# EAGLE board isp_programmer (EAGLE 4.03)
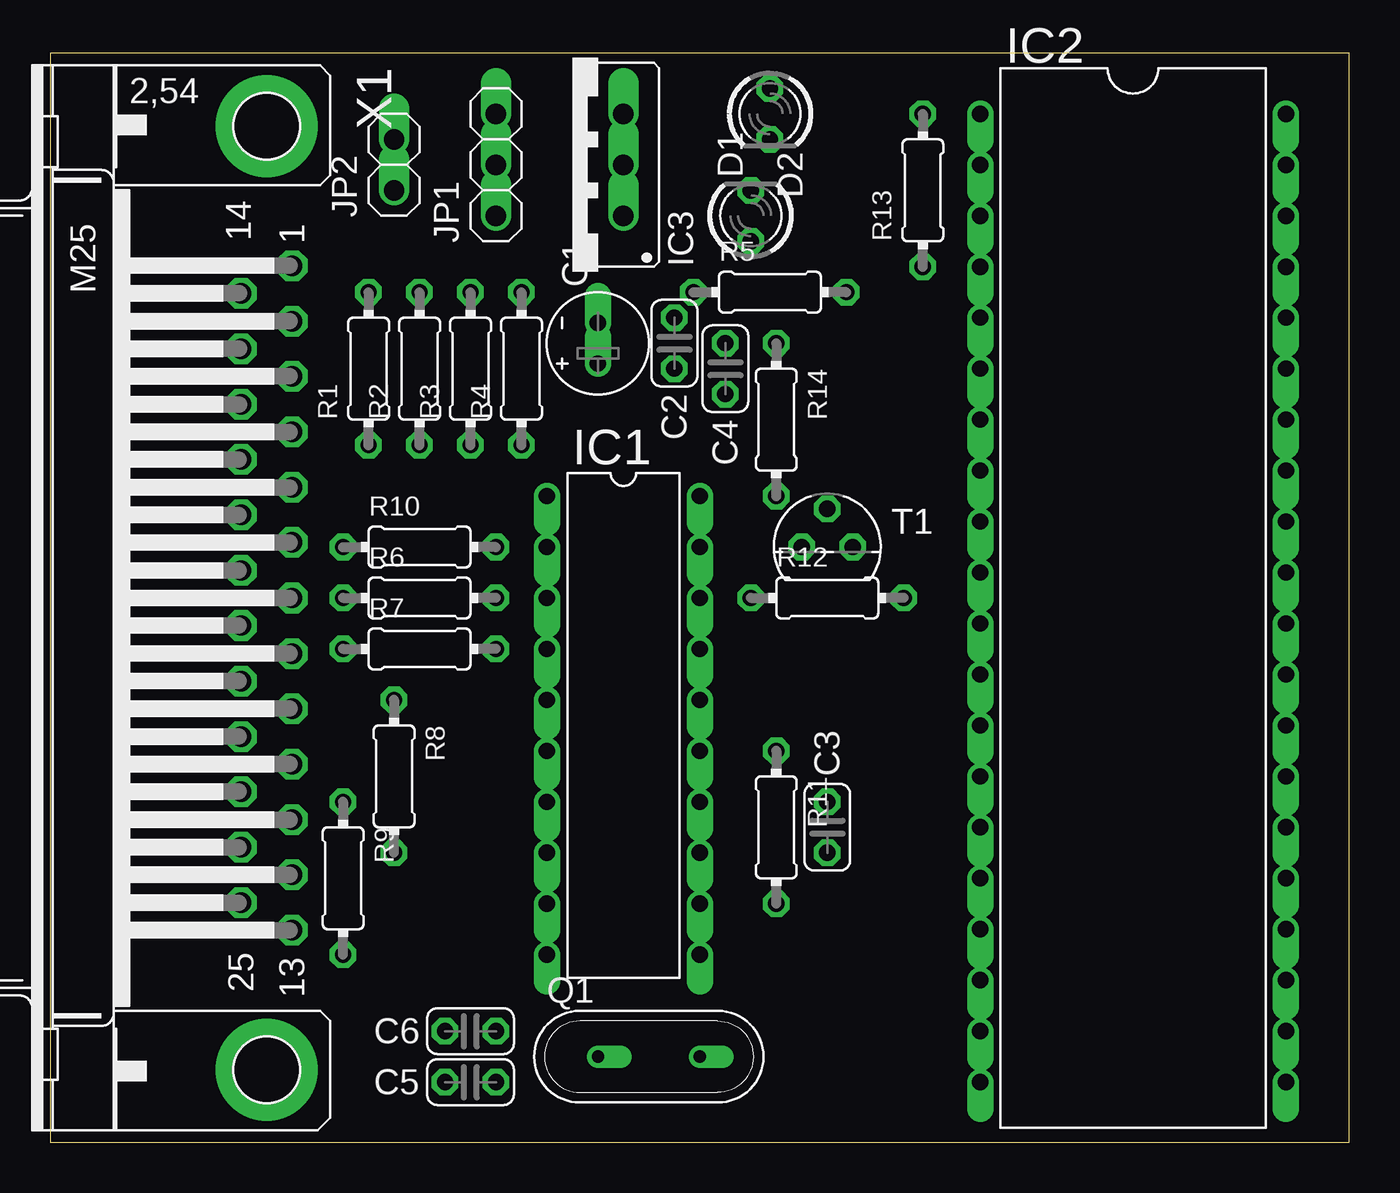
[diagram p0: board, top side]
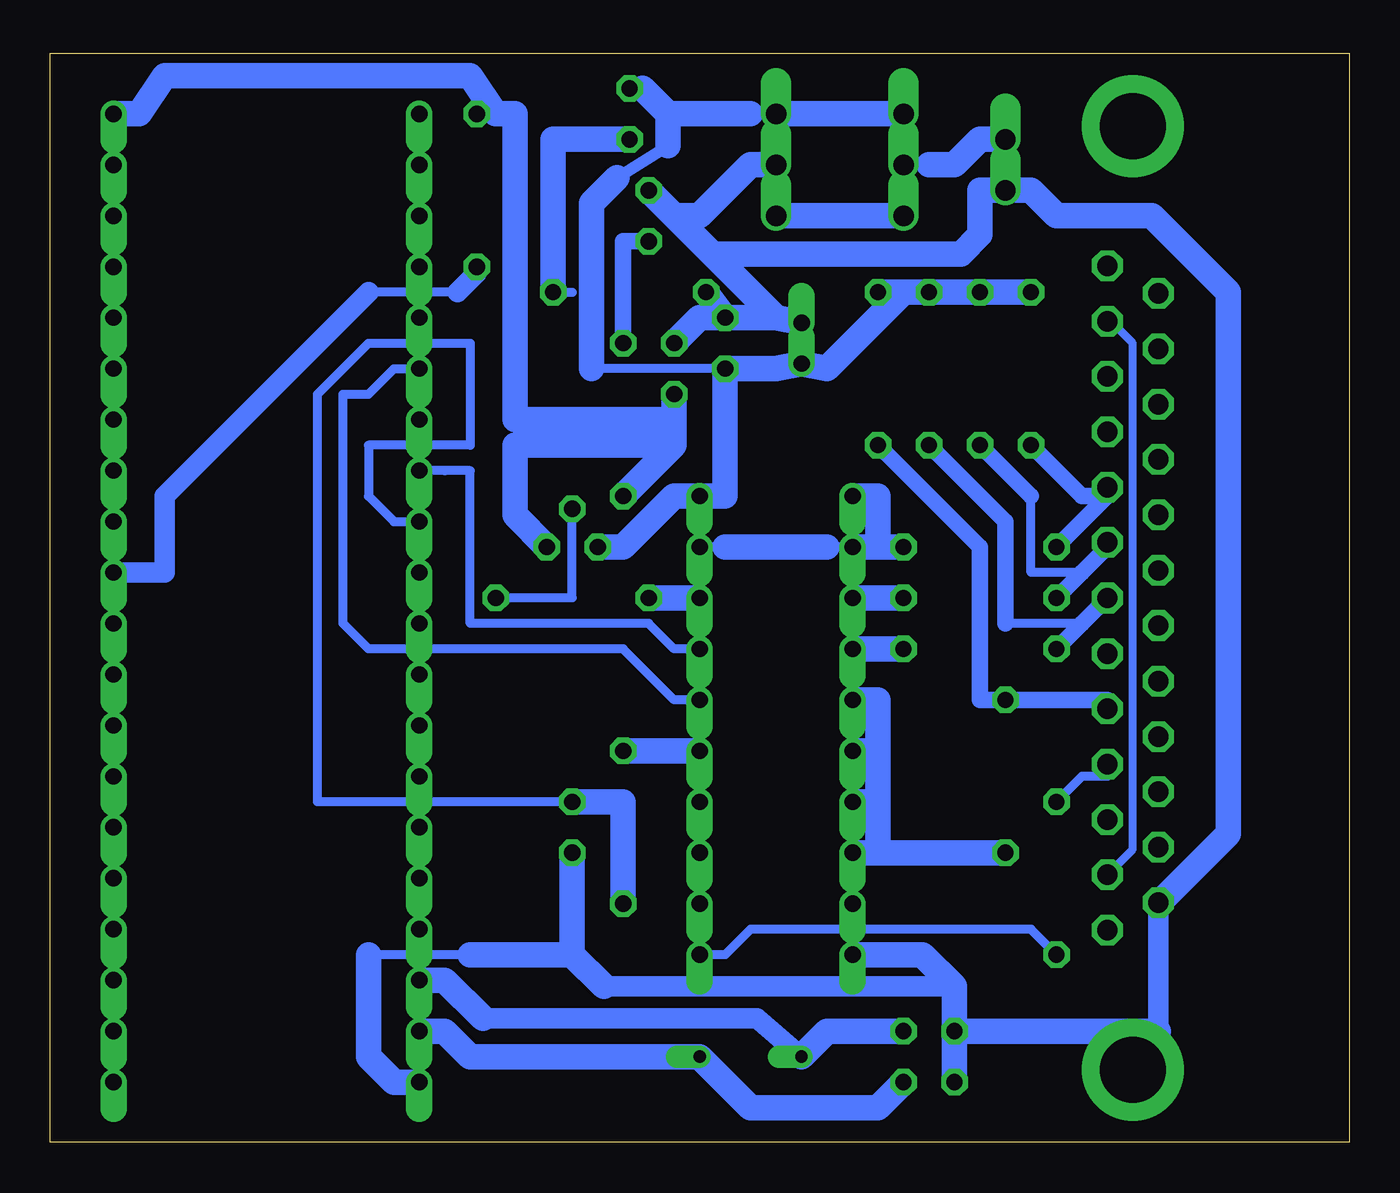
[diagram p1: board, bottom side, seen from below]

Size 64.75 x 54.28 mm. Coordinates in mm from the lower left corner, seen from the top.
Outline: 0,0 64.75,0 64.75,54.28 0,54.28 0,0
Copper layers used: Bottom

## Footprints (pad centres in the part's own frame; a part is rotated, then mirrored left to right if it is on the bottom)
E2-5 = drill 0.813 pad 1.27 offset: + -1.016,0; - 1.016,0
C025-024X044 = drill 0.813 octagon: 1 -1.27,0; 2 1.27,0
LED3MM = drill 0.813 octagon: A -1.27,0; K 1.27,0
DIL20 = drill 0.813 offset: 1 -11.43,-3.81; 2 -8.89,-3.81; 3 -6.35,-3.81; 4 -3.81,-3.81; 5 -1.27,-3.81; 6 1.27,-3.81; 7 3.81,-3.81; 8 6.35,-3.81; 9 8.89,-3.81; 10 11.43,-3.81; 11 11.43,3.81; 12 8.89,3.81; 13 6.35,3.81; 14 3.81,3.81; 15 1.27,3.81; 16 -1.27,3.81; 17 -3.81,3.81; 18 -6.35,3.81; 19 -8.89,3.81; 20 -11.43,3.81
DIL40 = drill 0.813 offset: 1 -24.13,-7.62; 2 -21.59,-7.62; 3 -19.05,-7.62; 4 -16.51,-7.62; 5 -13.97,-7.62; 6 -11.43,-7.62; 7 -8.89,-7.62; 8 -6.35,-7.62; 9 -3.81,-7.62; 10 -1.27,-7.62; 11 1.27,-7.62; 12 3.81,-7.62; 13 6.35,-7.62; 14 8.89,-7.62; 15 11.43,-7.62; 16 13.97,-7.62; 17 16.51,-7.62; 18 19.05,-7.62; 19 21.59,-7.62; 20 24.13,-7.62; 21 24.13,7.62; 22 21.59,7.62; 23 19.05,7.62; 24 16.51,7.62; 25 13.97,7.62; 26 11.43,7.62; 27 8.89,7.62; 28 6.35,7.62; 29 3.81,7.62; 30 1.27,7.62; 31 -1.27,7.62; 32 -3.81,7.62; 33 -6.35,7.62; 34 -8.89,7.62; 35 -11.43,7.62; 36 -13.97,7.62; 37 -16.51,7.62; 38 -19.05,7.62; 39 -21.59,7.62; 40 -24.13,7.62
78XXS = drill 1.016 offset: GND 0,-2.54; IN -2.54,-2.54; OUT 2.54,-2.54
1X03 = drill 1.016 offset: 1 -2.54,0; 2 0,0; 3 2.54,0
1X02 = drill 1.016 offset: 1 -1.27,0; 2 1.27,0
QS = drill 0.61 offset: 1 -2.54,0; 2 2.54,0
0204/7 = drill 0.813 octagon: 1 -3.81,0; 2 3.81,0
TO92 = drill 0.813 octagon: 1 1.27,0; 2 0,1.905; 3 -1.27,0
M25HP = drill 1.016 octagon: 1 -16.561,1.27; 2 -13.792,1.27; 3 -11.049,1.27; 4 -8.28,1.27; 5 -5.512,1.27; 6 -2.769,1.27; 7 0,1.27; 8 2.769,1.27; 9 5.512,1.27; 10 8.28,1.27; 11 11.049,1.27; 12 13.792,1.27; 13 16.561,1.27; 14 -15.189,-1.27; 15 -12.421,-1.27; 16 -9.652,-1.27; 17 -6.909,-1.27; 18 -4.14,-1.27; 19 -1.372,-1.27; 20 1.372,-1.27; 21 4.14,-1.27; 22 6.909,-1.27; 23 9.652,-1.27; 24 12.421,-1.27; 25 15.189,-1.27 | drill 3.302 pad 5.08 round: G1 -23.52,0; G2 23.52,0

## Placement (x,y rotation side)
C1  10u  [E2-5]  27.3,39.84 90 top
C2  100n  [C025-024X044]  31.11,39.84 270 top
C3  1n  [C025-024X044]  38.73,15.71 90 top
C4  100n  [C025-024X044]  33.65,38.57 270 top
C5  30p  [C025-024X044]  20.95,3.01 180 top
C6  30p  [C025-024X044]  20.95,5.55 180 top
D1  LED3MM  [LED3MM]  34.92,46.19 90 top
D2  LED3MM  [LED3MM]  35.87,51.27 270 top
IC1  74HCT541N  [DIL20]  28.57,20.79 270 top
IC2  AT89C52P  [DIL40]  53.97,27.14 270 top
IC3  [78XXS]  26.03,48.73 90 top
JP1  [1X03]  22.22,48.73 90 top
JP2  [1X02]  17.14,48.73 90 top
Q1  4Mhz  [QS]  29.84,4.28 0 top
R1  4.7k  [0204/7]  15.87,38.57 90 top
R2  4.7k  [0204/7]  18.41,38.57 90 top
R3  4.7k  [0204/7]  20.95,38.57 90 top
R4  4.7k  [0204/7]  23.49,38.57 90 top
R5  680  [0204/7]  35.87,42.38 0 top
R6  1k  [0204/7]  18.41,27.14 0 top
R7  100  [0204/7]  18.41,24.6 0 top
R8  100  [0204/7]  17.14,18.25 270 top
R9  100  [0204/7]  14.6,13.17 270 top
R10  100  [0204/7]  18.41,29.68 0 top
R11  100  [0204/7]  36.19,15.71 270 top
R12  3.3  [0204/7]  38.73,27.14 0 top
R13  1k  [0204/7]  43.49,47.46 90 top
R14  680  [0204/7]  36.19,36.03 270 top
T1  2N3906  [TO92]  38.73,29.68 0 top
X1  [M25HP]  10.79,27.14 270 top

## Library data of the parts
C1-C6 R1-R14 = rcl
D1 D2 = led
IC1 = 74xx-eu
IC2 = atmel
IC3 = v-reg
JP1 JP2 = pinhead
Q1 = special
T1 = transistor-pnp
X1 = con-subd

## Nets
GND: C1.- C2.1 C3.1 C4.1 C5.2 C6.2 D1.K IC1.10 IC2.20 IC3.GND JP2.1 R5.1 X1.25
N$1: R1.1 R10.1 X1.5
N$2: R2.1 R6.1 X1.6
N$3: R3.1 R7.1 X1.7
N$4: R4.1 R8.1 X1.9
N$5: IC1.4 R7.2
N$6: R9.1 X1.10
N$7: IC1.5 IC1.6 IC1.7 IC1.8 R8.2
N$8: IC1.3 R6.2
N$9: C5.1 IC2.19 Q1.2
N$10: IC1.1 IC1.2 IC1.19 R10.2
N$11: IC1.11 R9.2
N$12: C6.1 IC2.18 Q1.1
N$13: IC1.17 IC2.8
N$14: IC1.16 IC2.6
N$15: IC1.15 R11.1
N$16: C3.2 IC2.9 R11.2
N$17: D1.A R14.1
N$18: IC2.31 R13.1
N$19: IC3.IN JP1.1
N$20: R12.2 T1.2
N$21: IC1.18 R12.1
N$22: C4.2 IC2.40 R13.2 R14.2 T1.1
N$23: D2.K R5.2
N$24: JP1.2 JP2.2
N$25: X1.2 X1.12
VCC: C1.+ C2.2 D2.A IC1.20 IC3.OUT JP1.3 R1.2 R2.2 R3.2 R4.2 T1.3

## Tracks (layer width: path | path; a pad name or v marks a point on that pad's centre or on a via)
GND
  Bottom 0.457: 43.81,9.36 48.89,9.36 | 9.52,11.9 X1.25 | C4.1 | C2.1 | D1.K | C6.2
  Bottom 1.016: 19.68,7.77 37.14,7.77 | 9.52,5.55 9.52,11.9
  Bottom 1.27: 28.57,41.11 C2.1 | C2.1 R5.1 | C4.1 32.38,41.11 C2.1 | 31.74,44.28 28.57,41.11 | 31.74,44.28 33.65,46.19 | 33.65,46.19 D1.K | 28.57,41.11 C1.- | 31.74,44.28 19.36,44.28 18.41,45.24 18.41,47.46 JP2.1 15.87,47.46 14.6,46.19 9.84,46.19 6.03,42.38 6.03,15.39 9.52,11.9 | 33.65,46.19 32.38,46.19 29.84,48.73 IC3.GND | C5.2 C6.2 | C5.2 | C6.2 19.68,7.77 21.27,9.36 IC1.10 | 37.14,7.77 38.73,9.36 | 38.73,9.36 C3.1 | 48.89,9.36 48.89,4.28 47.62,3.01 IC2.20 | 38.73,9.36 43.81,9.36 | 48.89,9.36 | 9.52,5.55 | 9.52,5.55 C6.2
N$1
  Bottom 0.457: R10.1 | R1.1
  Bottom 0.813: R10.1 12.06,32.22 | R1.1 13.33,32.22 12.06,32.22 | 12.06,32.22 X1.5
N$2
  Bottom 0.457: 12.06,29.68 X1.6 | 15.87,32.22 15.87,28.41 13.33,28.41 | R6.1 | R2.1
  Bottom 0.813: 12.06,29.68 13.33,28.41 R6.1 | 15.87,32.22 R2.1
N$3
  Bottom 0.457: 13.33,25.87 17.14,25.87 | R7.1 | X1.7 | R3.1
  Bottom 0.813: X1.7 13.33,25.87 R7.1 | R3.1 17.14,30.95 17.14,25.87
N$4
  Bottom 0.457: R4.1 | R8.1
  Bottom 0.813: X1.9 12.06,22.06 R8.1 18.41,22.06 18.41,29.68 R4.1
N$5
  Bottom 0.457: R7.2
  Bottom 1.27: R7.2 23.49,24.6 IC1.4
N$6
  Bottom 0.457: R9.1 13.33,18.25 12.06,18.25 X1.10 | R9.1
N$7
  Bottom 0.457: R8.2
  Bottom 1.27: 23.49,16.98 23.49,19.52 | 23.49,19.52 23.49,22.06 IC1.5 | 23.49,19.52 IC1.6 | R8.2 23.49,14.44 | 23.49,14.44 23.49,16.98 | 23.49,16.98 IC1.7 | 23.49,14.44 IC1.8
N$8
  Bottom 0.457: R6.2
  Bottom 1.27: R6.2 23.49,27.14 IC1.3
N$9
  Bottom 0.457: C5.1 | Q1.2
  Bottom 1.27: IC2.19 45.08,5.55 43.81,4.28 Q1.2 29.84,1.74 23.49,1.74 C5.1
N$10
  Bottom 0.457: 31.11,29.68 IC1.19 | IC1.2 26.03,29.68 | R10.2
  Bottom 1.27: R10.2 23.49,29.68 | 26.03,29.68 31.11,29.68 | 23.49,29.68 23.49,32.22 IC1.1 | 23.49,29.68 IC1.2
N$11
  Bottom 0.457: R9.2 15.87,10.63 29.84,10.63 31.11,9.36 IC1.11 | R9.2
N$12
  Bottom 0.457: C6.1 | Q1.1
  Bottom 1.016: 43.18,6.19 29.52,6.19 Q1.1
  Bottom 1.27: Q1.1 26.03,5.55 C6.1 | 43.18,6.19 45.08,8.09 IC2.18
N$13
  Bottom 0.457: IC1.17 33.65,24.6 34.92,25.87 43.81,25.87 43.81,33.49 45.08,33.49 IC2.8
N$14
  Bottom 0.457: IC1.16 33.65,22.06 36.19,24.6 48.89,24.6 50.16,25.87 50.16,37.3 48.89,37.3 47.62,38.57 IC2.6
N$15
  Bottom 0.457: R11.1
  Bottom 1.27: R11.1 33.65,19.52 IC1.15
N$16
  Bottom 0.457: C3.2 51.43,16.98 51.43,37.3 48.89,39.84 43.81,39.84 43.81,34.76 48.89,34.76 48.89,32.22 47.62,30.95 IC2.9 | C3.2 | R11.2
  Bottom 1.27: R11.2 36.19,16.98 C3.2
N$17
  Bottom 0.457: D1.A
  Bottom 0.813: R14.1 36.19,44.92 D1.A | R14.1
N$18
  Bottom 0.457: 44.45,42.38 48.89,42.38 | 43.49,43.33 R13.1
  Bottom 1.016: 43.49,43.33 44.45,42.38 | 48.89,42.38 59.05,32.22 59.05,28.41 60.32,28.41 IC2.31
N$19
  Bottom 1.27: JP1.1 23.49,46.19 27.3,46.19 IC3.IN
N$20
  Bottom 0.457: R12.2 38.73,27.14 T1.2 | R12.2
N$21
  Bottom 0.457: R12.1
  Bottom 1.27: R12.1 33.65,27.14 IC1.18
N$22
  Bottom 0.457: 42.54,51.27 R13.2 | R14.2 | C4.2 | T1.1
  Bottom 1.27: 33.65,34.76 33.65,36.03 | R14.2 33.65,34.76 | 33.65,36.03 C4.2 | T1.1 41.59,31.27 41.59,34.76 33.65,34.76 | IC2.40 60.32,51.27 59.05,53.17 43.81,53.17 42.54,51.27 41.59,51.27 41.59,36.03 33.65,36.03
N$23
  Bottom 0.457: R5.2 38.73,42.38 | D2.K
  Bottom 1.27: R5.2 39.68,50 D2.K
N$24
  Bottom 0.457: 20.95,48.73 JP1.2
  Bottom 1.27: 20.95,48.73 19.68,48.73 18.41,50 JP2.2
N$25
  Bottom 0.406: X1.12 10.79,14.62 10.79,39.84 12.06,41.11 X1.2
VCC
  Bottom 0.457: 35.24,52.54 D2.A | 29.84,51.27 IC3.OUT | IC1.20 32.7,32.22 | C2.2 37.78,38.57 | C2.2 | R1.2 | R2.2 | R4.2 | R3.2
  Bottom 0.61: 36.51,48.09 33.97,49.68
  Bottom 1.27: 33.97,51.27 35.24,52.54 | 33.97,51.27 29.84,51.27 | JP1.3 23.49,51.27 27.3,51.27 IC3.OUT | 32.7,32.22 33.65,32.22 36.19,29.68 37.14,29.68 T1.3 | R1.2 R2.2 R3.2 22.22,42.38 | 22.22,42.38 R4.2 | 22.22,42.38 26.03,38.57 C1.+ 28.57,38.57 C2.2 31.11,32.22 IC1.20 | 33.97,49.68 33.97,51.27 | 36.51,48.09 37.78,46.83 37.78,38.57